# Altium PCB flyback2TOprint.PcbDoc
Units mil, origin at the board's own origin, x right, y up, seen from the top; angles counter-clockwise.
Board outline 6299.21 x 2367.2 mil, 2 copper layers (Top Layer, Bottom Layer); 67 components, 38 nets, 166 pads, 0 vias.
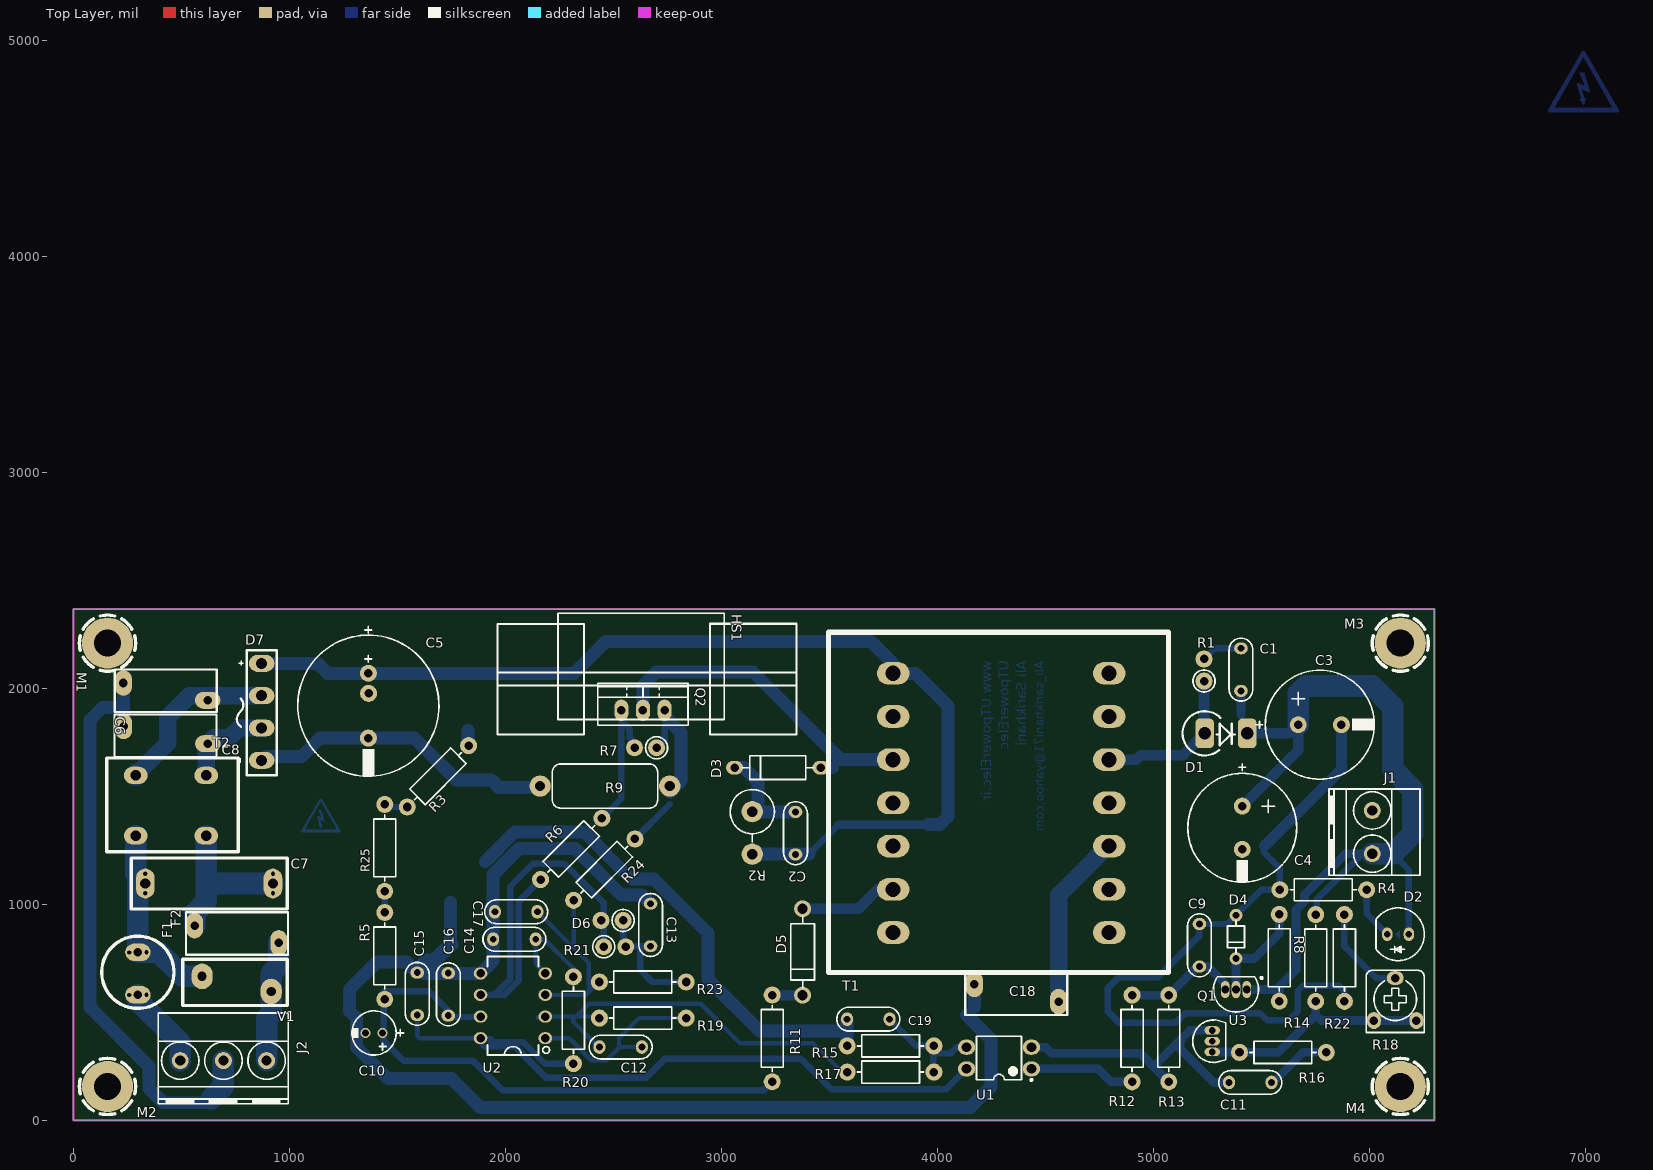
[diagram p0: Top Layer view]
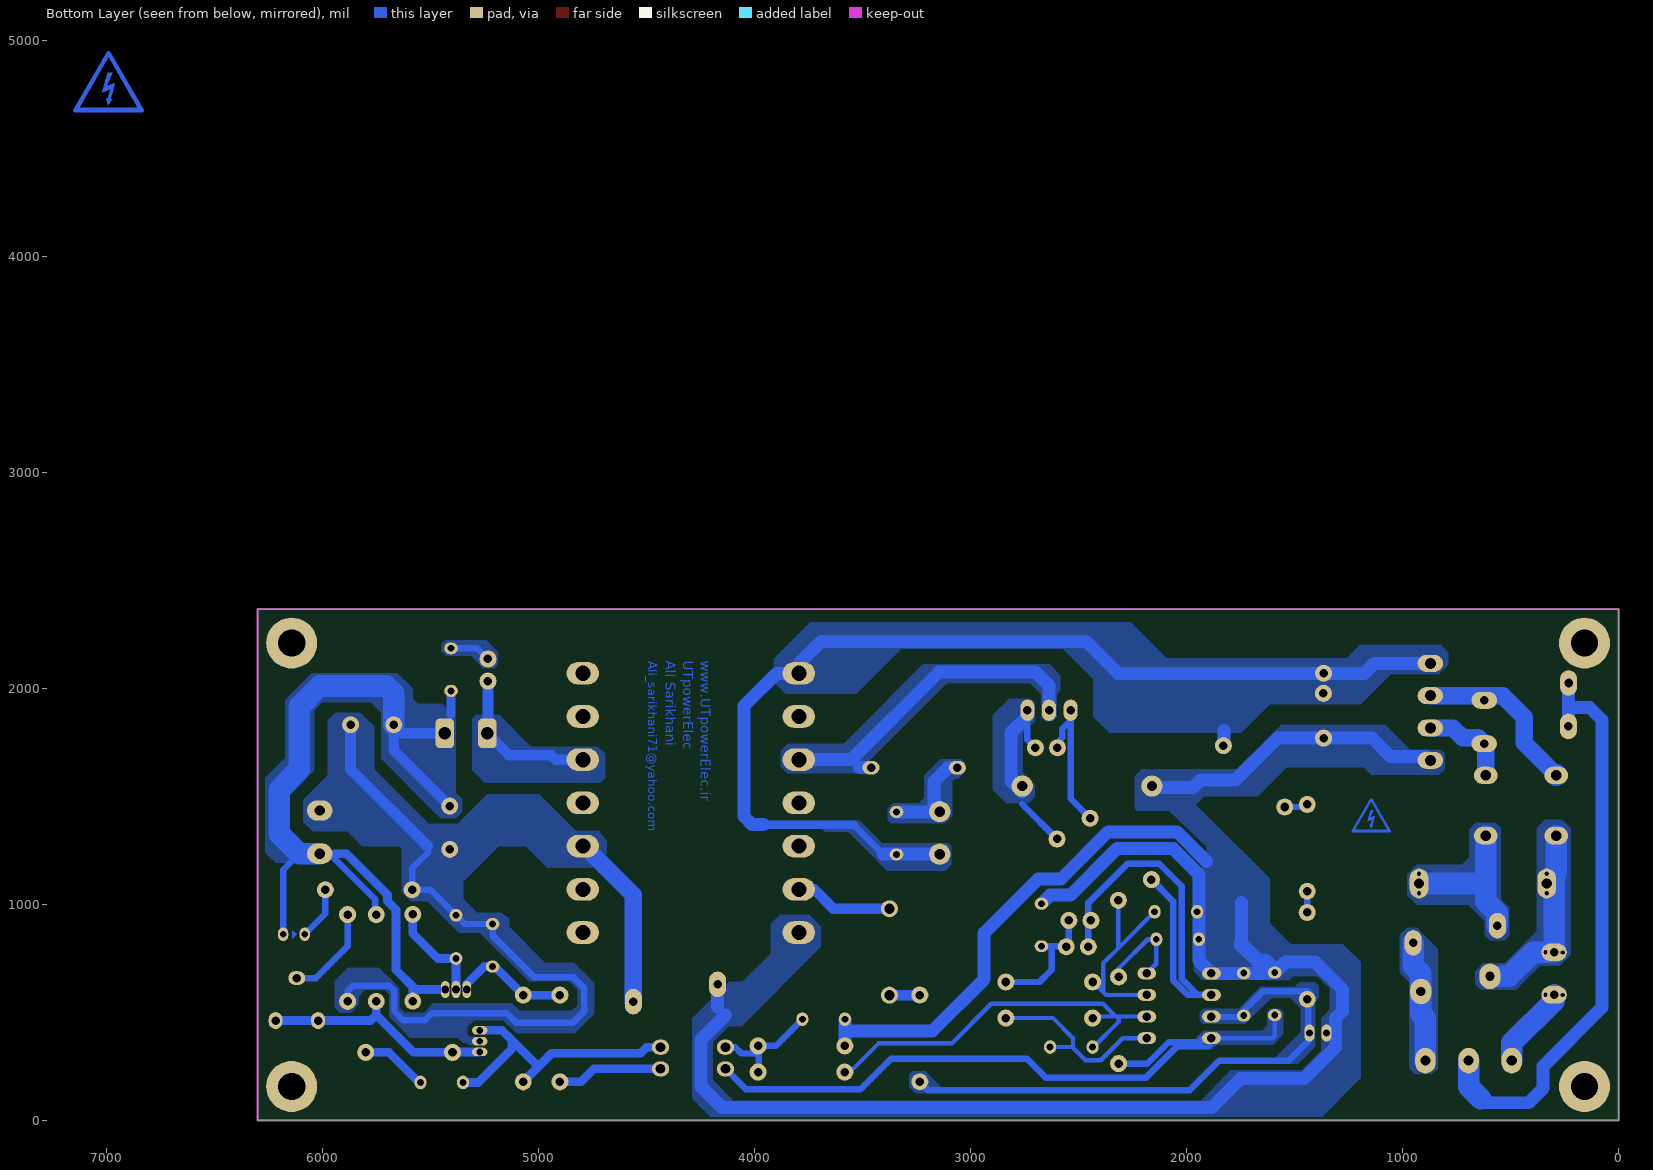
[diagram p1: Bottom Layer view, seen from below]

## Layer stack, top to bottom
Top Solder: solder mask 0.4, Solder Resist, Dk 3.5
Top Layer: signal copper 1.4
Dielectric 1: dielectric 12.6, FR-4, Dk 4.8
Bottom Layer: signal copper 1.4
Bottom Solder: solder mask 0.4, Solder Resist, Dk 3.5

## Board outline
0,0 0,2367.2 6299.21,2367.2 6299.21,0

## Design rules (kind name [scope] priority, off if disabled: settings)
Clearance [All] p1: gap=10 ignorepadtopadclearanceinfootprint=FALSE except(0: Arc-Hole Track-Hole SMDPad-Hole THPad-Hole Via-Hole Fill-Hole Poly-Hole Region-Hole Text-Hole)
ComponentClearance [All] p1: gap=0 collisioncheckmode=3 verticalgap=0 showdistances=FALSE
Height [All] p1: minheight=0 maxheight=99999 prefheight=500
PolygonConnect [All] p1: connectstyle=Direct reliefconductorwidth=10 reliefentries=4 polygonreliefangle="90 Angle" airgapwidth=10
RoutingVias [All] p1: holewidth=28 width=50 viastyle="Through Hole" minholewidth=28 minwidth=50 maxholewidth=28 maxwidth=50
SolderMaskExpansion [All] p1: expansion=4
Width [All] p1: maxlimit=100 minlimit=1 preferedwidth=10
28 further rules are at their usual default settings.

## Components (designator, comment, footprint, x,y, rotation, side; value= is the part's Value field where it differs from the comment)
C1 "Cap" C_CER_D7B 5404,2087 r90 top
C2 "2.2NF/1KV" C_CER_D7B 3342,1330 r270 top
C3 "330UF/35V" C_EL_12X25 5769,1832 r0 top
C4 "330UF/35V" C_EL_12X25 5410,1355 r270 top
C5 "68UF/400V" C_EL_16X25 1365,1920 r270 top
C6 "JM222 Y1 400V" JN222m#1 231,1985 r0 top (schematic designator C9a)
C7 "100NF/275 X2" 0.1ufx2275 923.11,1097 r180 top (schematic designator C4)
C8 "JM222 Y1 400V" JN222m#2 622,1784 r180 top (schematic designator C9a)
C9 "100NF" C_CER_D7B 5212,811 r90 top
C10 "100UF/25V" C_EL_5X11 1391,405 r180 top
C11 "3.9NF" C_CER_D7B 5447,176 r180 top
C12 "DNF" C_CER_D7B 2532.64,340 r180 top
C13 "2.2NF" C_CER_D7B 2671,905 r90 top
C14 "2.2NF" C_CER_D7B 2041,839 r0 top
C15 "100NF" C_CER_D7B 1591,586 r270 top
C16 "100NF" C_CER_D7B 1735,584 r270 top
C17 "330PF" C_CER_D7B 2049,966 r0 top
C18 "JM222 Y1 400V" JN222m#3 4560,590 r180 top (schematic designator C9a)
C19 "10NF" C_CER_D7B 3679,469 r0 top
D1 "BYW172" DO-201ADU 5236,1792 r0 top
D2 "LED 5mm G" LED5MM_BLU 6131,862 r180 top
D3 "UF4007" D_AX04_DO41#1 3260,1633 r180 top
D4 "ZENER15V" D_AX02_DO35 5381,850 r270 top
D5 "UF4007" D_AX04_DO41#2 3375,780 r270 top
D6 "1N4148" R025W_AX_VER 2493,926 r180 top
D7 "KBP206" GBP310 871,2116 r270 top (schematic designator D4a)
F1 "T3.15A" FUSE3.15A 298,686 r0 top
F2 "NTC 5D10" JN222m#3 560.43,862 r0 top (schematic designator C9a)
HS1 "Heat Sink" HSINK_TO220C 2631,1937 r0 top
J1 "KF129-5.08-2P" TBG_2 6011.89,1335 r90 top
J2 "KF129-5.08-3P" TBG_3 693.94,277 r180 top
M1 "HEX JACK SCREW 15MM+HEXAGON NUT 3MM" SCMH_M3 157.48,2209.72 r270 top (schematic designator M2)
M2 "HEX JACK SCREW 15MM+HEXAGON NUT 3MM" SCMH_M3 157.48,157.48 r0 top
M3 "HEX JACK SCREW 15MM+HEXAGON NUT 3MM" SCMH_M3 6141.73,2209.72 r180 top (schematic designator M2)
M4 "HEX JACK SCREW 15MM+HEXAGON NUT 3MM" SCMH_M3 6141.73,157.48 r90 top (schematic designator M2)
Q1 "2N2222" TO-226-AA 5381,606 r90 top
Q2 "IRF540" TO220_3 2636,1899 r0 top
R1 "Res Semi" R025W_AX_VER 5233,2085 r90 top
R2 "68K 1W" R2W_AX_VER 3142,1331 r270 top
R3 "68k" R025W_AX04 1687,1593 r45 top
R4 "4.7K" R025W_AX04 5785,1068 r0 top
R5 "68k" R025W_AX04 1441,762 r90 top
R6 "15" R025W_AX04 2304,1257 r225 top
R7 "10K" R025W_AX_VER 2648,1725 r180 top
R8 "2.7K" R025W_AX04 5581,753 r90 top
R9 "1" R1W_AX06 2460,1548 r0 top
R11 "10" R025W_AX04 3234,380 r90 top
R12 "2.7K" R025W_AX04 4900,379.64 r270 top
R13 "4.7K" R025W_AX04 5070,379.64 r270 top
R14 "43K" R025W_AX04 5750,752.21 r270 top
R15 "12K" R025W_AX04 3782,224 r0 top
R16 "220K" R025W_AX04 5598,315 r180 top
R17 "1K" R025W_AX04 3782,345 r180 top
R18 "POT 1K OHM" POT_7X5 6118,561 r0 top
R19 "12K" R025W_AX04 2635,474 r180 top
R20 "7.5K" R025W_AX04 2314,464 r90 top
R21 "7.5K" R025W_AX_VER 2505.21,804 r0 top
R22 "4.7K" R025W_AX04 5883,752.21 r270 top
R23 "22K" R025W_AX04 2635,641 r180 top
R24 "1K" R025W_AX04 2457,1161 r225 top
R25 "68k" R025W_AX04 1441,1262 r90 top
T1 "Trans3" etd34 4294,1470 r270 top (schematic designator T1a)
T2 "line filter" "EMI FILTER" 288,1318 r0 top (schematic designator LF1a)
U1 "PC817" DIP-4 4284,289 r180 top
U2 "UC3844+DS1009-8N" DIP_8 2034,531 r180 top
U3 "TL431" TO92_3 5271,367 r90 top
V1 "ZOV-10D431K" 10D511K 750,632 r0 top (schematic designator V1a)

## Footprints (in the part's own frame and the unit in brackets; to place one, negate y for a bottom-side part, rotate by r counter-clockwise, add the part's x,y. Pads: shape width x height; smd on the part's side, far side on the other; paste and mask are expansions set on the pad)
0.1ufx2275 [mm] "MPX2 0.1UF 275V"
  round 0 hole 0.5: 1(0,1.155) 1(0,-1.155) 2(15,-1.155) 2(15,1.155)
  oval 2.2x3.5 hole 1.2: 1(0,0) 2(15,0)
  silkscreen extent -1.7,-3 16.63,3
10D511K [mm] "Metal Oxide Varistor  Max. Continuous Voltage 320RMS"
  oval 2.5x3 hole 1.1: 1(4.191,-0.889) 2(-3.937,0.889)
  silkscreen extent -6.22,-2.54 6.1,2.92
C_CER_D7B [mm] "CAP, CER MULTILAYER, 7.0X2.6mm, pitch: 5.0mm"
  oval 1.4x1.6 hole 0.8 mask+0.075: 1(-2.5,0) 2(2.5,0)
  silkscreen extent -3.7,-1.4 3.7,1.4
C_EL_5X11 [mm] "Cap Elec, D5.0X11.0H pitch: 2mm"
  round 1.2 / inner round 1.2 / far side oval 1.2x2 hole 0.8: 1(-1,0) 2(1,0)
  silkscreen extent -3.5,-2.6 2.6,2.6
C_EL_12X25 [mm] "Cap Elec, D12.0X25.0H pitch: 5.0mm, RB.2/.5"
  round 2 hole 1: 1(-2.54,0) 2(2.54,0)
  silkscreen extent -7.5,-6.4 6.4,6.4
C_EL_16X25 [mm] "Cap Elec, D16.0X25.0H pitch: 7.6mm, RB.3/.6"
  round 2 hole 1: 1(-3.81,0) 2(3.81,0)
  silkscreen extent -9.3,-8.3 8.3,8.3
D_AX02_DO35 [mm] "DIODE 0.2 INCH SPACING DO-35, 1N4148"
  round 1.5 hole 0.8: 1(-2.54,0) 2(2.54,0)
  silkscreen extent -1.91,-1 1.93,1
D_AX04_DO41#1 [mm] "DIODE 0.4 INCH SPACING DO-41"
  oval 2x1.6 hole 1: 1(-5.08,0) 2(5.08,0)
  silkscreen extent -4.2,-1.4 4.2,1.4
D_AX04_DO41#2 [mm] "DIODE 0.4 INCH SPACING DO-41"
  round 2 hole 1.2: 1(-5.08,0) 2(5.08,0)
  silkscreen extent -4.2,-1.4 4.2,1.4
DIP-4 [mil] "DIP; 4 Leads; Row Spacing 7.62 mm; Pitch 2.54 mm"
  oval 80x70 hole 45: 1(-150,50) 2(-150,-50) 3(150,-50) 4(150,50)
  silkscreen extent -155,-100 104,106
DIP_8 [mm] "DIP, pitch 2.54mm, 300mil Width"
  oval 1.6x1.4 / inner round 1.4 / far side oval 2.2x1.4 hole 1: 1(-3.81,3.81) 2(-3.81,1.27) 3(-3.81,-1.27) 4(-3.81,-3.81) 5(3.81,-3.81) 6(3.81,-1.27) 7(3.81,1.27) 8(3.81,3.81)
  silkscreen extent -4.3,-5.8 3,5.8
DO-201ADU [mm] "DO-201AD  u"
  rrect50% 2.2x3.5 hole 1.5: 1(0,0) 2(5,0)
  silkscreen extent -2.6,-2.6 3.56,2.6
"EMI FILTER" [mil]
  oval 110x80 hole 47.24: 1(0,0) 2(0,279.53) 3(326.77,0) 4(326.77,279.53)
  silkscreen extent -135,-75 475,360
etd34 [mil]
  oval 105x150 hole 70: 1(-600,-500) 2(-400,-500) 3(-200,-500) 4(0,-500) 5(200,-500) 6(400,-500) 7(600,-500) 8(-600,500) 9(-400,500) 10(-200,500) 11(0,500) 12(200,500) 13(400,500) 14(600,500)
  silkscreen extent -790,-800 785,775
FUSE3.15A [mm] "FUSE 3.15A 250V Circular"
  round 0 hole 0.5: 1(-1.016,-2.667) 1(1.016,-2.632) 2(-1.016,2.333) 2(1.016,2.368)
  oval 3x2.032 hole 1: 1(0,-2.65) 2(0,2.35)
  silkscreen extent -4.25,-4.25 4.25,4.25
GBP310 [mm] "VRRM 1000V 3.0Amp Glass Passivated Bridge Rectifiers"
  oval 2x3 hole 1.3: 1(0,0) 2(3.8,0) 3(7.6,0) 4(11.4,0)
  silkscreen extent -1.52,-2.92 13.18,1.78
HSINK_TO220C [mil] "HEATSINK, TO-220,"
  silkscreen extent -388,-81 381,411
JN222m#1 [mm] "JNC JN222M 400V 2.2NF X1Y2 Safety Y Capacitor-in Capacitors"
  oval 2x3 hole 1: 1(0,1.016)
  oval 3x2 hole 1: 2(9.906,-1.016)
  silkscreen extent -1.02,-2.41 10.98,2.59
JN222m#2 [mm] "JNC JN222M 400V 2.2NF X1Y2 Safety Y Capacitor-in Capacitors"
  oval 3x2 hole 1: 1(0,1.016)
  oval 2x3 hole 1: 2(9.906,-1.016)
  silkscreen extent -1.02,-2.41 10.98,2.59
JN222m#3 [mm] "JNC JN222M 400V 2.2NF X1Y2 Safety Y Capacitor-in Capacitors"
  oval 2x3 hole 1: 1(0,1.016) 2(9.906,-1.016)
  silkscreen extent -1.02,-2.41 10.98,2.59
LED5MM_BLU [mm] "LED THD 5MM BLUE"
  oval 1.2x1.6 hole 0.8: 1(-1.27,0) 2(1.27,0)
  Bottom Layer region: -0.2,0.5 -0.2,-0.5 0.3,0
  silkscreen extent -3.1,-3.1 2.6,3.1
POT_7X5 [mm] "POT, TRIM, 7.5X5.0mm, pitch: 5.0mm"
  oval 1.6x2 hole 1: 1(-2.5,-2.5) 3(2.5,-2.5)
  oval 2x1.6 hole 1: 2(0,2.5)
  silkscreen extent -3.4,-3.9 3.4,3.4
R1W_AX06 [mm] "RESISTOR 1 WATT, AXIAL0.6"
  round 2.5 hole 1.2: 1(-7.62,0) 2(7.62,0)
  silkscreen extent -6.2,-2.6 6.2,2.6
R2W_AX_VER [mm] "RESISTOR 2 WATT, AXIAL0.8"
  round 2.5 hole 1.2: 1(-2.5,0) 2(2.5,0)
  silkscreen extent -5.1,-2.6 1.1,2.6
R025W_AX04 [mm] "RESISTOR 1/4 WATT, AXIAL0.4"
  round 2 hole 1: 1(-5.1,0) 2(5.1,0)
  silkscreen extent -3.9,-1.3 3.9,1.3
R025W_AX_VER [mm] "RESISTOR 1/4 WATT, AXIAL0.4"
  round 2 hole 1: 1(-1.3,0) 2(1.3,0)
  silkscreen extent -2.59,-1.3 0.01,1.3
SCMH_M3 [mm] "SCREW mouting, M3, 3.0mm diameter and 6.0mm PanHead"
  round 6 / inner round 3.5 / far side round 6 hole 3.2 mask+0.1: 1(0,0)
  Top Layer pour cut-out: 0,3.5 -1.339,3.234 -2.475,2.475 -3.234,1.339 -3.5,0 -3.5,0 -3.234,-1.339 -2.475,-2.475 -1.339,-3.234 0,-3.5 0,-3.5 1.75,-3.031 3.031,-1.75 3.5,0 3.5,0 3.234,1.339 2.475,2.475 1.339,3.234 0,3.5
  Bottom Layer pour cut-out: 0,3.5 -1.339,3.234 -2.475,2.475 -3.234,1.339 -3.5,0 -3.5,0 -3.234,-1.339 -2.475,-2.475 -1.339,-3.234 0,-3.5 0,-3.5 1.75,-3.031 3.031,-1.75 3.5,0 3.5,0 3.234,1.339 2.475,2.475 1.339,3.234 0,3.5
  silkscreen extent -3.3,-3.3 3.3,3.3
TBG_2 [mm] "Terminal Block Green"
  round 2 / inner round 2 / far side oval 2.4x3 hole 1.2: 1(-2.54,0) 2(2.54,0)
  silkscreen extent -5.08,-5.6 5.05,5.08
TBG_3 [mm] "Terminal Block Green"
  round 2 / inner round 2 / far side oval 2.4x3 hole 1.2: 1(-5.08,0) 2(0,0) 3(5.08,0)
  silkscreen extent -7.62,-5.6 7.67,5.08
TO92_3 [mm] "TO-92, SOT54"
  oval 1x1.8 hole 0.8 mask+0.1: 1(-1.27,0) 2(0,0) 3(1.27,0)
  silkscreen extent -2.5,-1.59 2.5,2.3
TO220_3 [mm] "TO-220 3 LEAD, TO-262, pitch: 2.54mm  10x4.5mm"
  oval 1.651x2.5 hole 1: 1(-2.54,0) 2(0,0) 3(2.54,0)
  silkscreen extent -5.33,-1.78 5.33,2.79
TO-226-AA [mm] "TO, Flat Index; 3 In-Line, Axial Leads; Body Dia. 4.8mm; Leads 0.55 x 0.51 mm (max)"
  oval 2x1 hole 0.9: 1(0,-1.27) 2(0,0) 3(0,1.27)
  silkscreen extent -2.65,-3.13 1.52,2.65

## Part data
C1: "Capacitor"
C2 C6 C7 C8 C9 C11 C12 C13 C14 C15 C16 C17 C18 C19: library part Cap, "Capacitor"
C3 C4 C5 C10: library part Cap2, "Capacitor"
D1 D3 D5 D6: library part 1N6095, "Schottky Rectifier"
D2: library part LED1, "Typical RED GaAs LED"
D4: library part DIODE_THD_ZENER, "DIODE, ZENER, 0.2W, 15V"
D7: library part CMP-0082068-2, "Diode, P-N-Bridge, 600 V, 25 A, TH"
F1 F2: library part "Fuse 2", "Cylindrical Fuses"
HS1: library part HeatSink
J1: library part CONN_TB2, "CONN, TERMINAL BLOCK, 5.08mm pitch"
J2: library part CONN_TB3, "CONN, TERMINAL BLOCK, 5.08mm pitch"
M1 M2 M3 M4: library part SCMH_M3, "SCREW mouting, M3, 3.0mm diameter and 6.0mm PanHead"
Q1: library part NPN, "NPN Bipolar Transistor"
Q2: "HEXFET N-Channel Power MOSFET"
R1: "Semiconductor Resistor"
R2 R3 R4 R5 R6 R7 R8 R9 R11 R12 R13 R14 R15 R16 R17 R19 R20 R21 R22 R23 R24 R25: library part "Res Semi", "Semiconductor Resistor"
R18: library part RPot, "Potentiometer"
T1: "Three-winding Transformer (Non-Ideal)"
T2: library part "Trans Cupl", "Transformer (Coupled Inductor Model)"
U1: library part Optoisolator1, "4-Pin Phototransistor Optocoupler"
U2: library part UC3845N, "High Performance Current Mode Controller"
U3: library part TL431AILP, "Programmable Precision Reference"
V1: library part "Res Varistor", "Metal Oxide Varistor"

## Free pads (board coordinates)
  round 78.74 hole 39.37: 2(1366,1977)

## Nets (pads, with @x,y where several pads share a name; then routed paths per layer and width w, separated by ;. In a path a pad name is that pad's centre, name@x,y a point inside that pad or via, vN(x,y) a via of type N, cw(c..) or ccw(c..) an arc to the next point about the centre after c; other vN are vias at no path point)
15V: C9.1 Q1.3 R12.1 R13.1 | length 545.1
  Bottom Layer w40: R12.1 R13.1 5202.15,712.57 C9.1 5250.43,712.57 5331,632 Q1.3
E: C6.1 C8.2 J2.2 | length 2835.6
  Bottom Layer w60: C6.1 231,1912 134,1912 76,1854 76,524 349,251 349,149 416,82 621.87,82 637,97.13 637,100 ; C8.2 C6.1@232,2024
  Bottom Layer w100: 637,100 693.94,156.94 J2.2
GND: C3.2 C4.2 C9.2 C18.1 D4.1 J1.2 R4.1 R22.2 T1.12 U3.2 | length 4187.8
  Bottom Layer w30: 5510,1242 5584.21,1167.79 R4.1 5499,1068 D4.1 5340.43,909.43 C9.2 5212,856 5020,664 4839,664 4788,613 4788,504 4839,453 5103,453 5146,496 5493,496 5525,464 5626,464 5667,505 5667,600 5691,624 5858,624 5883,599 R22.2
  Bottom Layer w50: 5513,1270 5869,1626 C3.2
  Bottom Layer w80: C18.1 4560,1044 4786,1270 T1.12
NetC1_2: C1.2 R1.2 | length 191.4
  Bottom Layer w30: R1.2 5282.24,2185.43 C1.2
NetC2_1: C2.1 D3.2 R2.1 | length 485.3
  Bottom Layer w60: D3.2 3104,1633 3168,1569 3168,1455.43 R2.1 3143,1428.43 C2.1
NetC6_2: C6.2 D7.2 T2.2 | length 806.9
  Bottom Layer w80: T2.2@288,1599 436,1747 436,1867 535.39,1966.39 D7.2
  Bottom Layer w100: T2.2 T2.2@288,1599
NetC7_1: C7.1 F2.1 T2.3 | length 742.8
  Bottom Layer w100: F2.1 560.43,960.43 614.77,1014.77 T2.3 ; 618.77,1097 C7.1@923.11,1097
NetC7_2: C7.2 F1.2 T2.1 V1.2 | length 886.8
  Bottom Layer w100: T2.1 288,1141.56 298,1131.56 298,778.53 395.47,778.53 507,667 V1.2
NetC8_1: C8.1 D7.3 T2.4 | length 428.6
  Bottom Layer w80: T2.4 614.77,1736.77 C8.1 649,1771 721,1771 766.79,1816.79 D7.3
NetC11_1: C11.1 R16.1 | length 310.9
  Bottom Layer w40: C11.1 5552,176 5691,315 R16.1
NetC11_2: C11.2 R13.2 U1.2 U3.3 | length 1376.5
  Bottom Layer w40: U1.2 4499,339 4527,311 4937.85,311 4995.85,253 ; R13.2 4995.85,253 ; U3.3 5168,417 5123.5,372.5 ; C11.2 5278,176 5123.5,330.5 5123.5,372.5 ; 4995.85,253 5004,253 5123.5,372.5
NetC12_1: C12.1 R19.1 U2.1 | length 898.3
  Bottom Layer w20: U2.1 2295,381 2397,279 2467,279 2525,337 2525,380.43 ; 2524.43,380.43 2618.06,474.06 R19.1@2835.79,474.06 ; 2528,340 C12.1@2625.43,340
NetC12_2: C12.2 R15.1 R19.2 U2.2 | length 1874.6
  Bottom Layer w20: U2.2@2149,476 U2.2@2190,476 ; U2.2 2314,481 ; 2327,481 2386,540 2903,540 3086,357 3425,357 R15.1@3562,220 ; C12.2@2428.57,340 2428.57,341.43 2314,456 2314,481 ; R19.2 2427.21,481 2314,481
NetC13_1: C13.1 D6.1 R21.2 R23.1 | length 585.6
  Bottom Layer w30: D6.1 2544.18,816.21 2553.82,806.57 2623,806.57 ; C13.1 2623,806.57 ; R23.1 2680,641 2623,698 2623,806.57
NetC14_2: C14.2 R20.2 U2.4 | length 446.2
  Bottom Layer w20: U2.4 2139.43,725.57 C14.2 2179,839 2314,704 R20.2
NetC15_2: C15.2 R20.1 U1.4 U2.8 | length 3911.8
  Bottom Layer w20: C15.2 1591,391 1601,381 U2.8 ; 1933,381 U2.8 ; 2552,201 2189,201 2051,339 1900,339 1884,355 U2.8
  Bottom Layer w30: 1933,362 2082,362 2180.79,263.21 R20.1 ; 2041,345 2189,197 2649,197 2738,286 3367,286 3509,144 4039,144 U1.4
NetC17_2: C17.2 R23.2 R24.2 U2.3 | length 953.3
  Bottom Layer w20: C17.2 2315.02,798.4 ; U2.3 2371,581 2385,595 ; R24.2 2315.02,798.4 ; R23.2@2410.21,641 2410.21,620.21 2385,595 ; 2315.02,798.4 2385,728.43 2385,595
NetC19_2: C19.2 R15.2 R17.1 U1.3 | length 529.9
  Bottom Layer w30: C19.2 3901.43,345 R17.1@3978.79,345 ; R15.2@3978.79,239 R17.1@3978.79,310 ; R17.1 R17.1@3978.79,345 ; U1.3 4088,339 4059,310 R17.1@3978.79,310 ; R17.1@3978.79,310 R17.1@3978.79,345
NetD1_1: D1.1 R1.1 T1.10 | length 731.4
  Bottom Layer w50: T1.10 4919,1670 4940,1691 5135,1691 D1.1 ; D1.1@5233,1795 R1.1
NetD2_2: D2.2 R4.2 | length 245.4
  Bottom Layer w30: R4.2 5985.79,957.21 D2.2
NetD3_1: D3.1 Q2.2 T1.3 | length 1520.9
  Bottom Layer w60: Q2.2 2636,2014 2698,2076 3145,2076 3551,1670 T1.3 ; D3.1 3514,1633
NetD4_2: D4.2 Q1.2 R8.2 | length 479.8
  Bottom Layer w40: Q1.2 D4.2 5465,750 5581,866 R8.2
NetD5_1: D5.1 T1.6 | length 456.3
  Bottom Layer w50: D5.1 3633,980 3723,1070 T1.6
NetD5_2: D5.2 R11.2 | length 141.3
  Bottom Layer w50: R11.2 3234.79,580 D5.2
NetD6_2: D6.2 R6.2 R21.1 U2.6 | length 2059.3
  Bottom Layer w30: U2.6@1876,582 1935,582 ; U2.6 1948,581 ; R6.2 2061,1014 2061,648 1994,581 1948,581 ; R21.1 2454.03,1006.97 2273,1188 2126,1188 2022,1084 2022,655 1948,581
NetF1_1: F1.1 J2.3 | length 385.8
  Bottom Layer w100: F1.1@298,581.68 298,555 493.94,359.06 J2.3
NetF2_2: F2.2 J2.1 V1.1 | length 568.4
  Bottom Layer w100: J2.1 893.94,473.94 915,495 V1.1 915,681 950.43,716.43 F2.2
NetQ2_1: Q2.1 R6.1 R7.2 | length 689.5
  Bottom Layer w30: R6.1 2536,1489 Q2.1@2536,1852 ; Q2.1 Q2.1@2536,1852 ; R7.2 2584,1737.82 2584,1763 2575,1772 2575,1813 Q2.1@2536,1852
NetQ2_3: Q2.3 R7.1 R9.2 R24.1 | length 777.8
  Bottom Layer w30: R24.1 2760,1464 ; R7.1 2736,1761.82 2736,1827
  Bottom Layer w60: Q2.3 2736,1872 2813,1795 2813,1573 R9.2@2760,1520
NetR3_1: R3.1 R25.2 | length 92.3
  Bottom Layer w30: R25.2@1452.77,1451.02 R3.1
NetR5_2: R5.2 R25.1 | length 98.4
  Bottom Layer w30: R5.2 R25.1
NetR12_2: R12.2 U1.1 | length 490.9
  Bottom Layer w40: U1.1 4742,239 4802.15,178.85 R12.2
NetR14_2: R14.2 R16.2 R18.1 R18.3 U3.1 | length 1089
  Bottom Layer w40: U3.1 R16.2@5395.21,317 ; R16.2 5577,315 5750,488 ; R14.2 5750,488 ; R18.3 R18.1 5775.43,462.57 5750,488
NetR18_2: R18.2 R22.1 | length 442.7
  Bottom Layer w30: R22.1 5883,806 6029.57,659.43 R18.2
PGND: C5.2 C10.2 C13.2 C14.1 C15.1 C16.1 C17.1 C18.2 C19.1 D7.4 R9.1 R17.2 T1.7 U2.5 | length 10063.2
  Bottom Layer w60: D7.4@887.82,1684 1055,1684 1141,1770 C5.2 1578,1770 1771,1577 1933,1577 1968,1542 R9.1@2152,1542 ; C15.1 1542.43,733 1404,733 1278,607 1278,506 1310,474 1310,339 1455,194 1749,194 1882,61 4151,61 4246,156 4246,376 4133,489 ; C15.1@1599.5,702.5 1621,681 U2.5 1942.57,739.57 C14.1 1942.57,1139.57 2061,1258 2322,1258 2536,1044 2630.43,1044 C13.2 ; 1746,815 1746,1008 ; 1906,1198 2044,1336 2363,1336 2581,1118 2686,1118 2936,868 2936,654 3175,415 3576,415 ; R17.2 C19.1@3581.21,468.36 ; T1.7 T1.7@3812,852 ; 4170,526 C18.2
  Bottom Layer w70: C15.1@1599.5,702.5 1636,739 1670,739 1746,815
VBUS: C2.2 C5.1 D7.1 pad.2 R2.2 R3.2 T1.1 | length 4959.9
  Bottom Layer w30: 3404.57,1232.57 3541,1369
  Bottom Layer w40: 3541,1369 3942,1369
  Bottom Layer w60: D7.1 1130,2116 1176,2070 C5.1 2317,2070 2465,2218 3691,2218 3794,2115 T1.1 3897,2070 4048,1919 4048,1407 4010,1369 3957,1369 ; R3.2@1826.98,1728.98 1826.98,1806.02 ; R2.2 3404.57,1232.57
VCC: C10.1 C16.2 R5.1 R11.1 U2.7 | length 2647.3
  Bottom Layer w30: C16.2@1735,479 1882,479 U2.7 ; C16.2 1735,509 1646.79,597.21 1435,597.21 1435,369 1528,276 1849,276 1984,141 3195.79,141 R11.1
VOUT: C1.1 C3.1 C4.1 D1.2 D2.1 J1.1 Q1.1 R8.1 R14.1 | length 4208.7
  Bottom Layer w30: R14.1@5754,943 5754,1022 J1.1@5967,1235 ; 6107,1235 6181,1161 D2.1
  Bottom Layer w40: 5404,1879 C1.1 ; Q1.1 5568,606 5581,619 ; R8.1 5581,619 ; J1.1 5967,1235 5888,1235 5698,1045 5698,1015 5659,976 5659,697 5581,619
  Bottom Layer w50: C4.1 5669,1714 C3.1 5629,1792 D1.2
  Bottom Layer w100: C3.1 5669,1977 5703,2011 6011,2011 6106,1916 6106,1625 6200,1531 6200,1328 6107,1235 J1.1
pads on no net: M1.1 M2.1 M3.1 M4.1 T1.2 T1.4 T1.5 T1.8 T1.9 T1.11 T1.13 T1.14

## Polygon pours and split planes (outlines as drawn)
VOUT on Bottom Layer "Top Layer-No Net" (solid, pour order 42): 5382,1797 5382,1517 5359,1494 5353,1488 5353,1428 5383,1398 5388,1398 5451,1398 5483,1430 5727,1674 5727,1911 5710,1928 5602,1928 5445,1928 5382,1865
GND on Bottom Layer "Top Layer-No Net" (solid, pour order 40): 4719.5,1341 4826,1341 4995,1510 5235.5,1510 5310.5,1435 5372.5,1373 5417.5,1373 5507.5,1373 5579.5,1445 5759.5,1625 5759.5,1732 5759.5,1824 5811.5,1876 5823.5,1888 5933.5,1888 5939.5,1888 5961.5,1866 5975.5,1852 5975.5,1651 5975.5,1597 5850.5,1472 5547.5,1169 5282.5,1169 5182.5,1269 5057.5,1269 4957.5,1169 4748,1169 4683.5,1233.5 4683.5,1292
NetD1_1 on Bottom Layer "Top Layer-No Net" (solid, pour order 38): 4691,1697 4691,1586 4714,1563 5002,1563 5249,1563 5306,1620 5306,1860 5289,1877 5205,1877 5180,1877 5034,1731 4930,1731 4725,1731
VCC on Bottom Layer "Top Layer-No Net" (solid, pour order 36): 3058,154 3136,154 3151,169 3210,228 3256,228 3269,228 3279,218 3283,214 3283,158 3283,154 3263,134 3255,126 3106,126
NetC15_2 on Bottom Layer "Top Layer-No Net" (solid, pour order 34): 1551,504 1551,399 1599,351 1844,351 1860,351 1877,334 1882,329 1954,329 1954,385 1930,409 1923,416 1835,416 1650,416 1625,441 1625,504 1611,518 1565,518
VCC on Bottom Layer "Top Layer-No Net" (solid, pour order 32): 1924,447 1727,447 1695,479 1605,569 1525,569 1519,569 1472,522 1470,520 1470,437 1470,408 1616,262 1484,262 1457,289 1403,343 1403,457 1403,550 1388,565 1388,624 1405,641 1406,640 1457,640 1478,640 1494,624 1499,619 1627,619 1657,619 1681,595 1758,518 1908,518 1923,518 1939,502 1939,462
PGND on Bottom Layer "Top Layer-No Net" (solid, pour order 20): 2239,1593 2239,1443 2229,1433 1984,1433 1917,1500 1671,1500 1535,1636 1180,1636 1144,1600 831,1600 805,1626 805,1697 825,1717 964,1717 1079,1832 1561,1832 1767,1626 1942,1626 2206,1626
VBUS on Bottom Layer "Top Layer-No Net" (solid, pour order 24): 3088,1266 3088,1183 3114,1157 3386,1157 3483,1254 3566,1337 3673.5,1337 3706.25,1369.75 3570,1364 3546,1388 3512,1388 3407,1283 3102,1283 3089,1270
NetD3_1 on Bottom Layer "Top Layer-No Net" (solid, pour order 16): 2600,1974 2600,1867 2619,1848 2653,1848 2671,1866 2671,1970 2724,2023 2804,2023 3110,2023 3157,1976 3525,1608 3611,1608 3847,1608 3877,1638 3877,1712 3845,1744 3587,1744 3536,1795 3220,2111 2633,2111 2584,2062 2584,1999 2584,1990
VBUS on Bottom Layer "Top Layer-No Net" (solid, pour order 14): 788,2143 788,2110 826,2072 832,2066 913,2066 1055,2066 1087,2034 1194,1927 1614,1927 1746,1795 1834.84,1795 2358,1795 2431,1868 2431,2043 2572,2184 3319,2184 3427,2076 3528,1975 3803,1975 3855,1975 3912,2032 3911,2033 3911,2137 3741,2307 2258,2307 2091,2140 1906,2140 1257,2140 1229,2168 1196,2201 857,2201 822,2201 788,2167
NetC1_2 on Bottom Layer "Top Layer-No Net" (solid, pour order 52): 5447,2170 5425,2150 5376,2150 5313,2150 5281,2118 5257,2094 5203,2094 5188,2109 5188,2169 5204,2185 5242,2223 5405,2223 5431,2223 5447,2207
VOUT on Bottom Layer "Top Layer-No Net" (solid, pour order 50): 5721.01,1881.01 5776,1936 5845,1936 5999,1936 6036,1899 6036,1620 6114,1542 6157,1499 6157,1294 6157,1214 6138,1195 6140,1193 6212,1193 6216,1193 6247,1224 6263,1240 6263,1549 6263,1586 6196,1653 6171,1678 6171,1948 6049,2070 5871,2070 5652,2070 5596,2014 5582,2000 5582,1958 5582,1953 5536.01,1907.01
GND on Bottom Layer "Top Layer-No Net" (solid, pour order 44): 6045,1339 5884,1339 5863,1318 5814,1269 5604,1269 5604,1360 5755,1511 5828,1584 5918,1584 5962.5,1584 5975.5,1597 6087,1485.5 6087,1381
GND on Bottom Layer "Top Layer-No Net" (solid, pour order 46): 5174,961 5282,961 5329,1008 5347,1026 5347,1105 5263.44,1188.56 5356.8,1269 5631,1269 5631,1106 5631,1056 5610,1035 5590,1015 5535,1015 5515,1015 5436,936 5368,868 5179,868 5163,868 5143,888 5135,896 5135,936
NetC2_1 on Bottom Layer "Top Layer-No Net" (solid, pour order 22): 3026,1656 3026,1612 3057,1581 3072,1581 3083,1570 3083,1409 3116,1376 3371,1376 3379,1384 3383,1388 3383,1445 3359,1469 3345,1469 3238,1469 3223,1484 3214,1493 3214,1572 3214,1597 3139,1672 3042,1672
GND on Bottom Layer "Top Layer-No Net" (solid, pour order 48): 5272,871 5045,644 4857,644 4818,605 4818,534 4830,522 4845,507 4972,507 5087,507 5118,538 5122,542 5356,542 5486,542 5500,528 5529,499 5578,499 5618,499 5639,520 5643,524 5643,583 5643,612 5679,648 5739,708 5870,708 5882,708 5934,656 5943,647 5943,570 5943,522 5924,503 5920,499 5869,499 5831,537 5831,560 5831,576 5815,592 5803,604 5758,604 5711,604 5692,585 5689,582 5689,500 5689,479 5624,414 5594,384 5372,384 5347,359 5331,359 5317.5,345.5 5279,345.5 5268,359 5297,388 5319,388 5328,397 5328,433 5297,464 5201,464 5162,464 5110,412 5102,404 4831,404 4740,495 4740,635 4774,669 4836,731 4970,731 5135,896
NetF2_2 on Bottom Layer "Top Layer-No Net" (solid, pour order 54): 914,872 837,795 837,430 837,240 861,216 944,216 954,226 969,241 969,450 969,640 1001,672 1013,684 1013,833 1013,859 979,893 933,893 929,889
NetC7_2 on Bottom Layer "Top Layer-No Net" (solid, pour order 56): 222,1355 222,767 268,721 272,717 349,717 362,717 433,646 474,605 565,605 638,605 650,617 663,630 663,691 626,728 610,728 526,728 490,764 378,876 378,1021 378,1355 340,1393 260,1393
NetC7_1 on Bottom Layer "Top Layer-No Net" (solid, pour order 58): 546,1354 546,1026 533,1013 506,986 506,883 506,854 524,836 526,834 596,834 620,858 620,870 620,922 626,928 696,998 879,998 934,998 979,1043 979,1138 973,1144 933,1184 874,1184 726,1184 701,1209 692,1218 692,1346 660,1378 646,1378 570,1378
NetQ2_3 on Bottom Layer "Top Layer-No Net" (solid, pour order 18): 2701,1934 2701,1849 2719,1831 2758,1792 2758,1611 2706,1559 2703,1556 2703,1497 2731,1469 2834,1469 2896,1531 2896,1805 2896,1878 2821,1953 2720,1953
PGND on Bottom Layer "Top Layer-No Net" (solid, pour order 30): 1622,650 1524,650 1506,668 1394,668 1376,650 1340,614 1337,611 1337,515 1337,513 1368,482 1376,474 1376,323 1444,255 1467,232 1632,232 1794,232 1934,92 2699,92 4097,92 4184,179 4193,188 4193,363 4119,437 4059,437 3692,804 3692,899 3745,952 3883,952 3925,910 3925,903 3925,831 3925,772 4055,642 4118,642 4287,473 4287,101 4204,18 4027,18 1372,18 1213,177 1194,196 1194,734 1276,816 1304,816 1518,816 1655.27,953.27
PGND on Bottom Layer "Top Layer-No Net" (solid, pour order 60): 1533,709 1590,652 1928,652 1966,690 1966,715 1966,1131 1926,1171 1906,1191 1906,1259 1906,1268 2084,1437 2071,1476 1970,1476 1903,1409 1615,1121 1615,841

## Keep-outs
Keep-Out Layer:
  the board outline again, w10

## Other copper
Bottom Layer:
  region: 1091 vertices and 1 holes, not listed, extent 6826.91,4666 7151.54,4948.11
  region: 619 vertices and 0 holes, not listed, extent 6960.2,4700.34 7018.25,4849.99
  region: 1091 vertices and 1 holes, not listed, extent 1055.34,1334.04 1234.37,1489.62
  region: 619 vertices and 0 holes, not listed, extent 1128.84,1352.98 1160.86,1435.51
  text "www.UTpowerElec.ir" at 4247,2127 h45 r90
  text "UTpowerElec" at 4329,2127 h45 r90
  text "Ali Sarikhani" at 4409,2127 h45 r90
  text "Ali_sarikhani71@yahoo.com" at 4491,2125 h40 r90

## Silkscreen, mask and mechanical layers (free items; w line width, h text height)
Top Overlay:
  lines w10: 1965.09,2014 3343.05,2014 ; 1965.09,2073.09 3343.05,2073.09 ; 2360.61,1786.28 1963.05,1786.28 1963.05,2298.09 2360.61,2298.09 ; 2363.05,1786.28 2363.05,2298.09 ; 2946,1787.19 2946,2299 ; 2948.44,1787.19 3346,1787.19 3346,2299 2948.44,2299
Drill Guide:
  lines w19.68: 1136,1884 1576,1884 1673,1787 ; 4332,713 4332,201 4401,132